# Altium PCB PCB2.PcbDoc
Units mm, origin at the board's own origin, x right, y up, seen from the top; angles counter-clockwise.
Board outline 54 x 26.8 mm, 2 copper layers (Top Layer, Bottom Layer); 33 components, 29 nets, 139 pads, 41 vias.
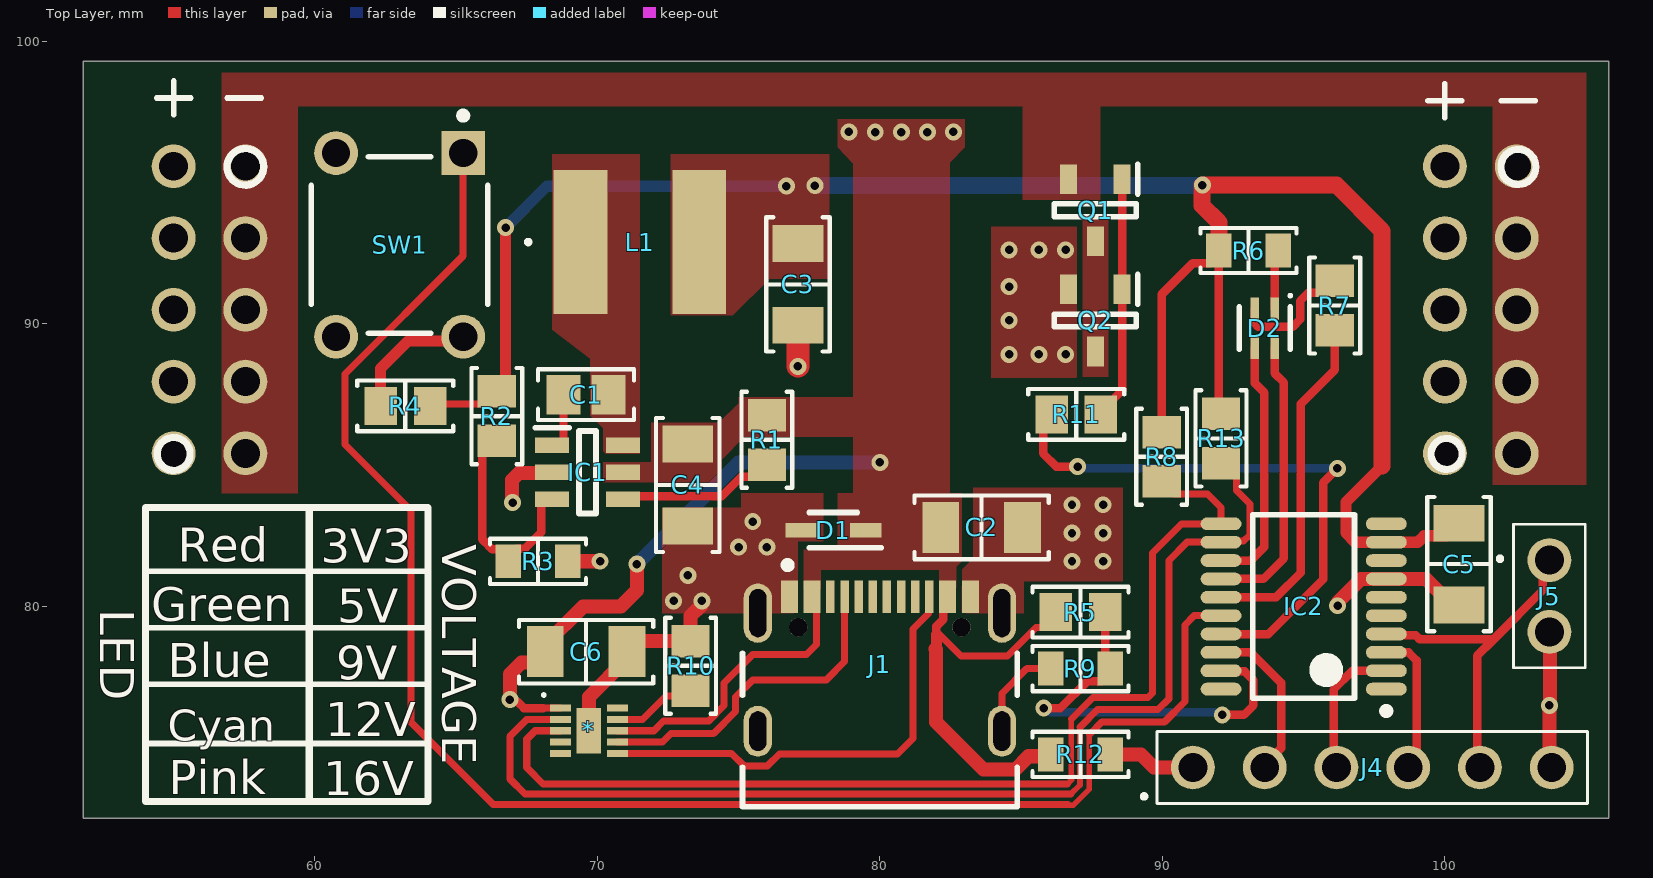
[diagram p0: Top Layer view]
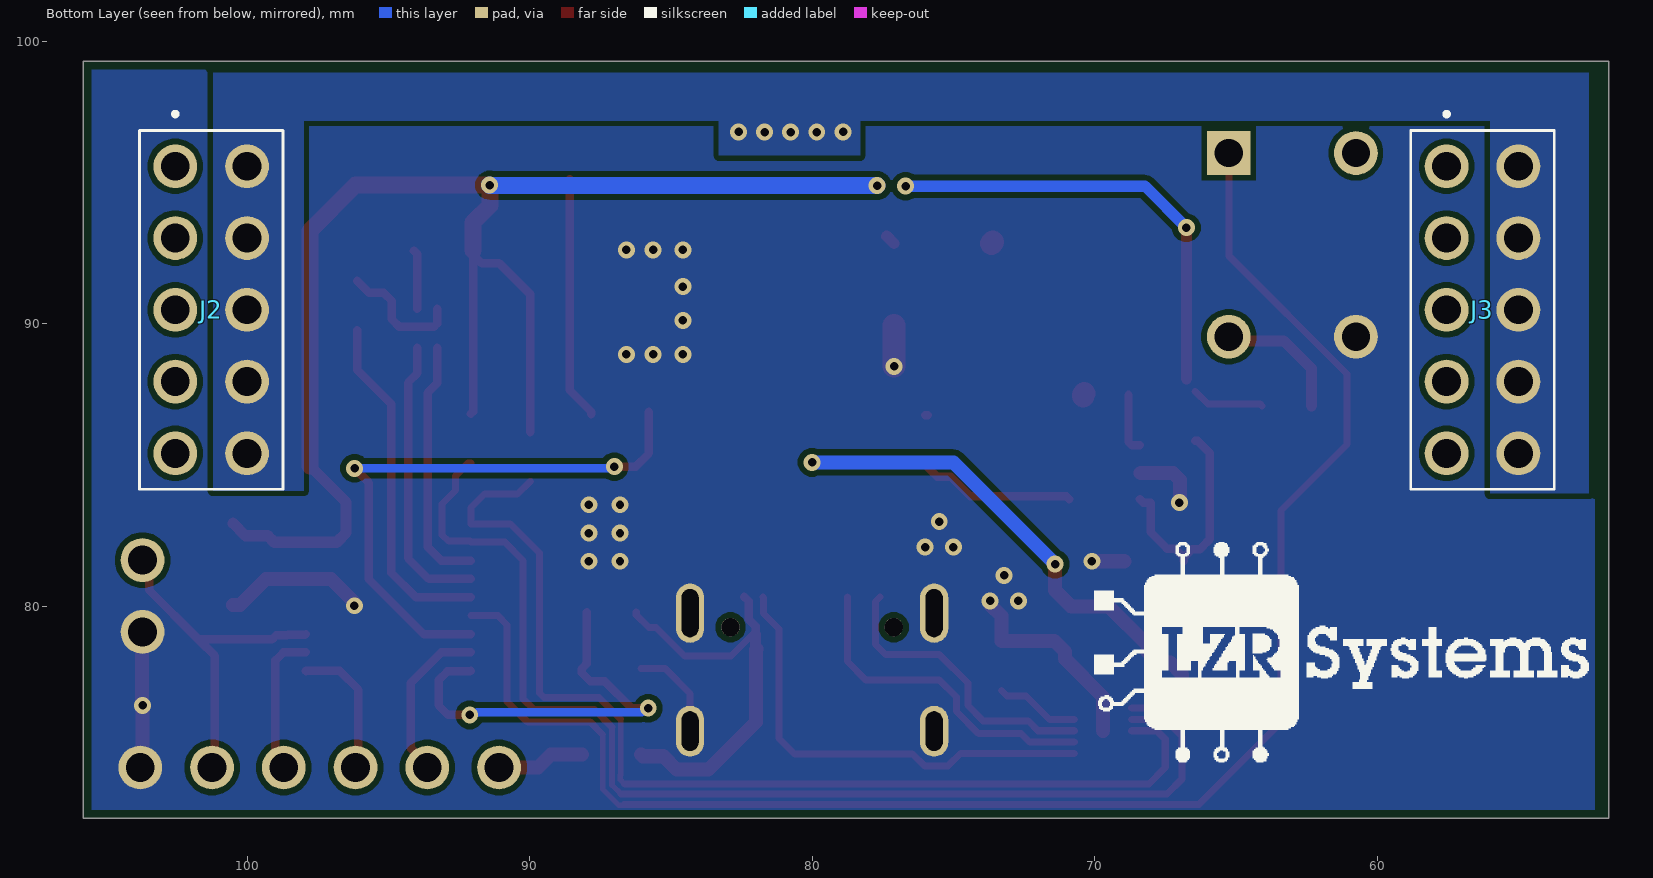
[diagram p1: Bottom Layer view, seen from below]
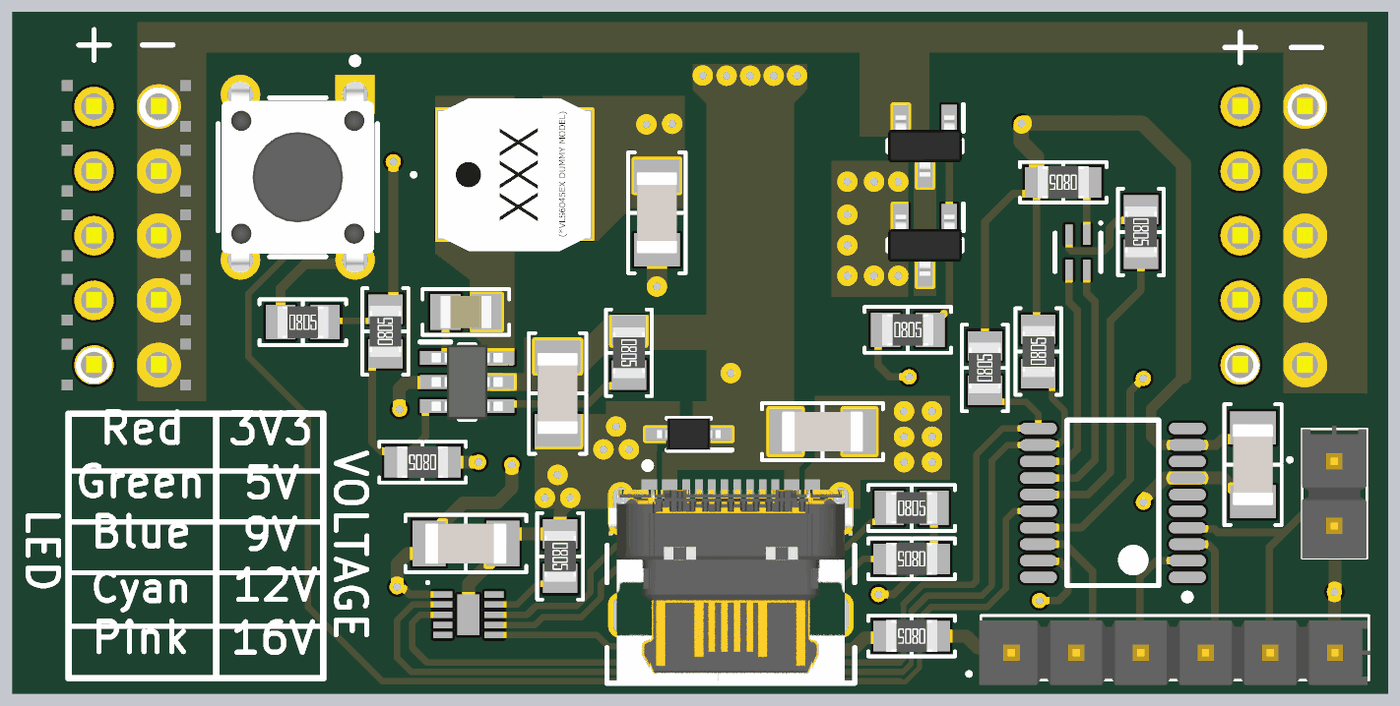
[diagram p2: 3D render of the assembled board from above, using the file's embedded part models]

## Layer stack, top to bottom
Top Solder: solder mask 0.0102, Solder Resist, Dk 3.5
Top Layer: signal copper 0.0356
Dielectric 1: dielectric 0.32, FR-4, Dk 4.8
Bottom Layer: signal copper 0.0356
Bottom Solder: solder mask 0.0102, Solder Resist, Dk 3.5

## Board outline
51.8,72.5 51.8,99.3 105.8,99.3 105.8,72.5

## Design rules (kind name [scope] priority, off if disabled: settings)
BoardOutlineClearance [All] p1: gap=0.3 ignorepadtopadclearanceinfootprint=FALSE except(0.4: Arc-SplitBarrior Arc-SplitContinuation Track-SplitBarrior Track-SplitContinuation SMDPad-SplitBarrior SMDPad-SplitContinuation THPad-SplitBarrior THPad-SplitContinuation Via-SplitBarrior Via-SplitContinuation Fill-SplitBarrior Fill-SplitContinuation Poly-SplitBarrior Poly-SplitContinuation Region-SplitBarrior Region-SplitContinuation Text-SplitBarrior Text-SplitContinuation)
Clearance "Clearance Different Nets" [All] p1: gap=0.2 ignorepadtopadclearanceinfootprint=FALSE except(0.089: Arc-Arc Arc-Track Arc-SMDPad Track-Track Track-SMDPad; 0.127: SMDPad-SMDPad SMDPad-Via THPad-Via Via-Via; 0.254: Arc-Via Arc-Text Track-Via Track-Text SMDPad-Text THPad-Text Via-Text Fill-Text Poly-Text Region-Text Text-Text; 0.5: THPad-THPad Via-Hole)
Clearance "Clearance Same Nets" [All] p2: gap=0.2 ignorepadtopadclearanceinfootprint=FALSE except(0.089: Arc-Arc Arc-Track Arc-SMDPad Track-Track Track-SMDPad SMDPad-SMDPad; 0.127: SMDPad-Via THPad-Via; 0.254: Arc-Via Arc-Text Track-Via Track-Text SMDPad-Text THPad-Text Via-Via Via-Text Fill-Text Poly-Text Region-Text Text-Text)
Clearance "Clearance Bottom Layer" [OnLayer('Bottom Layer')] p3: gap=0.203 ignorepadtopadclearanceinfootprint=TRUE except(0.254: Arc-Text Track-Text SMDPad-Text THPad-Text Via-Text Fill-Text Poly-Text Region-Text Text-Text)
Clearance "Clearance Top Layer" [OnLayer('Top Layer')] p4: gap=0.203 ignorepadtopadclearanceinfootprint=TRUE except(0.254: Arc-Text Track-Text SMDPad-Text THPad-Text Via-Text Fill-Text Poly-Text Region-Text Text-Text)
ComponentClearance [All] p1 off: gap=0.1 collisioncheckmode=3 verticalgap=0.1 showdistances=TRUE donotcheckwithout3dbody=TRUE
HoleSize [All] p1: absolutevalues=TRUE maxlimit=6.3 minlimit=0.2 maxpercent=80.000 minpercent=20.000
MinimumAnnularRing [All] p1: minimumring=0.13
MinimumSolderMaskSliver [All] p1: minsoldermaskwidth=0.1
PolygonConnect PolygonConnect_1 [All] p1: connectstyle=Direct reliefconductorwidth=0.508 reliefentries=4 polygonreliefangle="90 Angle" airgapwidth=0.254
RoutingCorners [All] p1: cornerstyle=Round minsetback=2.54 maxsetback=2.54
RoutingVias [All] p1: holewidth=0.5 width=1 viastyle="Through Hole" minholewidth=0.2 minwidth=0.35 maxholewidth=1 maxwidth=2
SilkToSilkClearance [All] p1: silktosilkclearance=0.1
SilkToSolderMaskClearance [IsPad] p1: minsilkscreentomaskgap=0.1 clearancetoexposedcopper=TRUE
SolderMaskExpansion [All] p1: expansion=0.102 istentingtop=FALSE
SupplyNets "Schematic Supply Nets_3" [InNet('+VBUS')] p1: voltage=0.000
SupplyNets "Schematic Supply Nets_2" [InNet('GND')] p2: voltage=0.000
SupplyNets "Schematic Supply Nets_1" [InNet('+2.9V')] p3: voltage=0.000
SupplyNets "Schematic Supply Nets" [InNet('+5V')] p4: voltage=0.000
Width [All] p1: maxlimit=2.54 minlimit=0.089 preferedwidth=0.381
24 further rules are at their usual default settings.

## Components (designator, comment, footprint, x,y, rotation, side; value= is the part's Value field where it differs from the comment)
* "CH224Q" SON40P200X75_HS-11N 69.7,75.6 r0 top
C1 "0.1 µF" "CAP 0805_2012" 69.6,87.5 r0 top
C2 "10 µF" "CAP 1206_3216 - 0.8MM" 83.6,82.8 r180 top
C3 "22 µF" "CAP 1206_3216 - 0.8MM" 77.1,91.4 r90 top
C4 "2.2 µF" "CAP 1206_3216 - 0.8MM" 73.2,84.3 r90 top
C5 "1µF" "CAP 1206_3216 - 1.0MM" 100.5,81.5 r90 top
C6 "1µF" "CAP 1206_3216 - 1.0MM" 69.6,78.4 r180 top
D1 "PESD24VS1UA,115" SOD2512X110N 78.35,82.7 r180 top
D2 "CLMUD-FKC-CH1NP1561BB7T4S3" SON70P150X100-4N 93.625,89.85 r270 top
IC1 "DCP3601NMR" SOT95P280X125-6N 69.65,84.75 r0 top
IC2 "CH32V006F8P6" TSOP65P640X110-20N 95,80 r180 top
J1 "USB4105-GF-A" FP-USB4105-GF-A-MFG 80,76.75 r0 top locked
J2 "TSW-105-07-F-D" TSW-105-XX-YY-D 102.54,95.58 r270 bottom
J3 "TSW-105-07-F-D" TSW-105-XX-YY-D 57.54,95.58 r270 bottom
J4 "TSW-106-14-F-S" TSW-106-XX-YY-S 91.08,74.3 r0 top
J5 "TSW-102-07-F-S" TSW-102-XX-YY-S 103.7,81.64 r270 top
L1 "VLS6045EX-150M" VLS6045 71.5,92.9 r0 top
Q1 "PMV20XNER" SOT95P230X110-3N 87.625,94.025 r270 top
Q2 "PMV20XNER" SOT95P230X110-3N 87.625,90.125 r270 top
R1 "10 k" "RES 0805_2012" 76,85.9 r270 top
R2 "64.9 kOhms" "RES 0805_2012" 66.439,86.737 r90 top
R3 "27 kOhms" "YAGEO RES 0805_2012" 67.9,81.6 r180 top
R4 "10 k" "RES 0805_2012" 63.2,87.1 r0 top
R5 "10 k" "RES 0805_2012" 87.1,79.8 r0 top
R6 "10 Ohms" "YAGEO RES 0805_2012" 93.05,92.6 r180 top
R7 "68 Ohms" "RES 0805_2012" 96.1,90.65 r270 top
R8 "4.7 kOhms" "RES 0805_2012" 89.975,85.3 r90 top
R9 "2.7 kOhms" "YAGEO RES 0805_2012" 87.1,77.8 r180 top
R10 "6.8 kOhms" "RES 0805_2012" 73.3,77.9 r270 top
R11 "100R" "RES 0805_2012" 86.95,86.8 r0 top
R12 "0 Ohms" "YAGEO RES 0805_2012" 87.1,74.763 r180 top
R13 "4.7 kOhms" "RES 0805_2012" 92.075,85.95 r90 top
SW1 "TL1105AF160Q" FP-TL1105AF160Q-MFG 63,92.8 r270 top

## Footprints (in the part's own frame and the unit in brackets; to place one, negate y for a bottom-side part, rotate by r counter-clockwise, add the part's x,y. Pads: shape width x height; smd on the part's side, far side on the other; paste and mask are expansions set on the pad)
"CAP 0805_2012" [mm] "Chip Capacitor, 2-Leads, Body 2.00x1.20mm, IPC Medium Density"
  rect 1.2x1.4 smd: 1(-0.8,0) 2(0.8,0)
  silkscreen extent -1.7,-0.9 1.7,0.9, body extent -1,-0.64 1,0.64, height 1.26
"CAP 1206_3216 - 0.8MM" [mm] "Chip Capacitor, 2-Leads, Body 3.25x1.60mm, IPC Medium Density"
  rect 1.3x1.8 smd: 1(-1.45,0) 2(1.45,0)
  silkscreen extent -2.37,-1.12 2.37,1.12, body extent -1.6,-0.8 1.6,0.8, height 0.8
"CAP 1206_3216 - 1.0MM" [mm] "Chip Capacitor, 2-Leads, Body 3.25x1.60mm, IPC Medium Density"
  rect 1.3x1.8 smd: 1(-1.45,0) 2(1.45,0)
  silkscreen extent -2.37,-1.12 2.37,1.12, body extent -1.6,-0.8 1.6,0.8, height 1
FP-TL1105AF160Q-MFG [mm]
  rect 1.55x1.55 hole 1 paste-2539.97 mask+0: 1(-3.25,2.25)
  round 1.55 hole 1 paste-2539.97 mask+0: 2(3.25,2.25) 3(-3.25,-2.25) 4(3.25,-2.25)
  silkscreen extent -4.7,-3.13 3.13,3.13, body extent -4.13,-3.22 4.13,3.22, height 0.25
FP-USB4105-GF-A-MFG [mm]
  rrect100% 1x2.1 hole 1.7 slot 0.6 at 0 deg paste-2539.97 mask+0: 1(-4.32,3.015) 2(4.32,3.015)
  rrect100% 1x1.8 hole 1.4 slot 0.6 at 0 deg paste-2539.97 mask+0: 3(-4.32,-1.165) 4(4.32,-1.165)
  rect 0.6x1.15 smd paste+0 mask+0: A1-B12(-3.2,3.59) A4-B9(-2.4,3.59) B1-A12(3.2,3.59) B4-A9(2.4,3.59)
  rect 0.3x1.15 smd paste+0 mask+0: A5(-1.25,3.59) A6(-0.25,3.59) A7(0.25,3.59) A8(1.25,3.59) B5(1.75,3.59) B6(0.75,3.59) B7(-0.75,3.59) B8(-1.75,3.59)
  round 0.65 hole 0.65 unplated paste-2539.97 mask+0: ""(-2.89,2.515) ""(2.89,2.515)
  silkscreen extent -4.86,-3.84 4.86,4.84, body extent -4.96,-3.94 4.96,4.27, height 0.25
"RES 0805_2012" [mm] "Chip Resistor, 2-Leads, Body 2.00x1.25mm, IPC Medium Density"
  rect 1.15x1.35 smd: 1(-0.875,0) 2(0.875,0)
  silkscreen extent -1.7,-0.9 1.7,0.9, body extent -1,-0.62 1,0.63, height 0.6
SOD2512X110N [mm]
  rect 1.1x0.5 smd: 1(-1.15,0) 2(1.15,0)
  silkscreen extent -1.7,-0.63 0.85,0.63, body extent -1.24,-0.63 1.24,0.62, height 0.93
SON40P200X75_HS-11N [mm] "SON, 10-Leads, Body 2.05x2.05mm, Pitch 0.40mm, Thermal Pad 1.60x0.87mm, IPC Medium Density"
  rect 0.87x1.6 smd: 0(0,0)
  rect 0.75x0.25 smd: 1(-1.01,0.8) 2(-1.01,0.4) 3(-1.01,0) 4(-1.01,-0.4) 5(-1.01,-0.8) 6(1.01,-0.8) 7(1.01,-0.4) 8(1.01,0) 9(1.01,0.4) 10(1.01,0.8)
  silkscreen extent -1.65,1.22 -1.55,1.32, body extent -1.05,-1.05 1.05,1.05, height 0.75
SON70P150X100-4N [mm] "SON, 4-Leads, Body 1.50x1.50mm, Pitch 0.70mm, IPC Medium Density"
  rect 0.8x0.3 smd: 1(-0.69,0.35) 2(-0.69,-0.35) 3(0.69,-0.35) 4(0.69,0.35)
  silkscreen extent -1.2,-0.9 0.75,0.95, body extent -0.75,-0.75 0.75,0.75, height 1
SOT95P230X110-3N [mm]
  rect 1.05x0.6 smd: 1(-1.1,0.95) 2(-1.1,-0.95) 3(1.1,0)
  silkscreen extent -1.63,-1.45 0.23,1.5, body extent -1.2,-1.45 1.2,1.45, height 0.95
SOT95P280X125-6N [mm]
  rect 1.2x0.55 smd: 1(-1.25,0.95) 2(-1.25,0) 3(-1.25,-0.95) 4(1.25,-0.95) 5(1.25,0) 6(1.25,0.95)
  silkscreen extent -1.85,-1.46 0.3,1.58, body extent -1.4,-1.46 1.4,1.46, height 1.25
TSOP65P640X110-20N [mm] "TSOP, 20-Leads, Body 6.50x4.40mm, Pitch 0.65mm, IPC Medium Density"
  oval 1.45x0.45 smd: 1(-2.925,2.925) 2(-2.925,2.275) 3(-2.925,1.625) 4(-2.925,0.975) 5(-2.925,0.325) 6(-2.925,-0.325) 7(-2.925,-0.975) 8(-2.925,-1.625) 9(-2.925,-2.275) 10(-2.925,-2.925) 11(2.925,-2.925) 12(2.925,-2.275) 13(2.925,-1.625) 14(2.925,-0.975) 15(2.925,-0.325) 16(2.925,0.325) 17(2.925,0.975) 18(2.925,1.625) 19(2.925,2.275) 20(2.925,2.925)
  silkscreen extent -3.05,-3.25 1.8,3.82, body extent -2.2,-3.25 2.2,3.25, height 1.1
TSW-102-XX-YY-S [mm]
  round 1.55 hole 1.02: 1(0,0) 2(2.54,0)
  silkscreen extent -1.27,-1.8 3.81,1.27, body extent -1.39,-1.28 3.82,1.26, height 9.16
TSW-105-XX-YY-D [mm]
  round 1.55 hole 1.02: 1(0,0) 2(0,2.54) 3(2.54,0) 4(2.54,2.54) 5(5.08,0) 6(5.08,2.54) 7(7.62,0) 8(7.62,2.54) 9(10.16,0) 10(10.16,2.54)
  silkscreen extent -1.9,-1.27 11.43,3.81, body extent -1.29,-1.27 11.41,3.81, height 11.9
TSW-106-XX-YY-S [mm]
  round 1.55 hole 1.02: 1(0,0) 2(2.54,0) 3(5.08,0) 4(7.62,0) 5(10.16,0) 6(12.7,0)
  silkscreen extent -1.78,-1.27 13.97,1.27, body extent -1.33,-1.46 14.04,1.08, height 8.12
VLS6045 [mm]
  rect 1.9x5.1 smd: 1(-2.1,0) 2(2.1,0)
  silkscreen extent -4,-0.05 -3.9,0.05, body extent -3,-3 3,3, height 4.5
"YAGEO RES 0805_2012" [mm] "Chip Resistor, 2-Leads, Body 2.00x1.25mm"
  rect 0.9x1.2 smd: 1(-1.05,0) 2(1.05,0)
  silkscreen extent -1.7,-0.8 1.7,0.8, body extent -1,-0.62 1,0.63, height 0.6

## Part data
*: library part CMP-019-00057-3, "USB-PD 3.2 Sink Controller, EPR, PPS, AVS, I2C"
C1: library part CC0805MRX7R9BB104, "CAP CER 0.1UF 50V X7R 0805", Device Package="0805 (2012 Metric)", manufacturer=Yageo, Operating Temperature="-55°C ~ 125°C", Supplier Part Number 1=311-4351-1-ND, Temperature Coefficient=X7R, Tolerance=±20%, Voltage - Rated=50V, Applications="General Purpose", Capacitance="0.1 µF", componentlink1description=Datasheet, componentlink1url=https://www.yageo.com/upload/media/product/productsearch/datasheet/mlcc/UPY-GPHC_X7R_6.3V-to-50V_18.pdf, componentlink2description="DigiKey Link", componentlink2url=https://www.digikey.com/en/products/detail/yageo/CC0805MRX7R9BB104/5884281, lastupdated="2/9/2024 8:16:09 PM", Lifecycle Status=Active, Minimum Order=1, Mounting Type="Surface Mount, MLCC", Package / Case="0805 (2012 Metric)", packaging=TapeAndReel, Part Number=CC0805MRX7R9BB104, Part Status=Active, partid=2475, price=0.01, series=CC, Size / Dimension="0.079\" L x 0.049\" W (2.00mm x 1.25mm)", Supplier 1=DigiKey, Thickness (Max)="0.037\" (0.95mm)"
C2: library part TMK316ABJ106KD-T, "CAP CER 10UF 25V X5R 1206", Device Package="1206 (3216 Metric)", manufacturer="Taiyo Yuden", Operating Temperature="-55°C ~ 85°C", Supplier Part Number 1=587-3236-1-ND, Temperature Coefficient=X5R, Tolerance=±10%, Voltage - Rated=25V, Applications="SMPS Filtering", Capacitance="10 µF", componentlink1description=Datasheet, componentlink1url=https://www.yuden.co.jp/productdata/catalog/mlcc01_e.pdf, componentlink2description="DigiKey Link", componentlink2url=https://www.digikey.com/en/products/detail/taiyo-yuden/TMK316ABJ106KD-T/3479441, lastupdated="6/4/2024 7:10:37 PM", Lifecycle Status=Active, Minimum Order=1, Mounting Type="Surface Mount, MLCC", Package / Case="1206 (3216 Metric)", packaging=TapeAndReel, Part Number=TMK316ABJ106KD-T, Part Status=Active, partid=39924, price=0.06, series=M, Size / Dimension="0.126\" L x 0.063\" W (3.20mm x 1.60mm)", Supplier 1=DigiKey, Thickness (Max)="0.037\" (0.95mm)"
C3: library part CL31A226MOCLNNC, "CAP CER 22UF 16V X5R 1206", Device Package="1206 (3216 Metric)", manufacturer="Samsung Electro-Mechanics", Operating Temperature="-55°C ~ 85°C", Supplier Part Number 1=1276-2728-1-ND, Temperature Coefficient=X5R, Tolerance=±20%, Voltage - Rated=16V, Applications="General Purpose", Capacitance="22 µF", componentlink1description=Datasheet, componentlink1url=http://www.samsungsem.com/kr/support/product-search/mlcc/CL31A226MOCLNNC.jsp, componentlink2description="DigiKey Link", componentlink2url=https://www.digikey.com/en/products/detail/samsung-electro-mechanics/CL31A226MOCLNNC/3888386, Features="Low Profile", lastupdated="6/4/2024 7:10:40 PM", Lifecycle Status=Active, Minimum Order=1, Mounting Type="Surface Mount, MLCC", Package / Case="1206 (3216 Metric)", packaging=TapeAndReel, Part Number=CL31A226MOCLNNC, Part Status=Active, partid=19106, price=0.04, series=CL, Size / Dimension="0.126\" L x 0.063\" W (3.20mm x 1.60mm)", Supplier 1=DigiKey, Thickness (Max)="0.037\" (0.95mm)"
C4: library part GCJ31CR71H225KA12K, "CAP CER 2.2UF 50V X7R 1206", Device Package="1206 (3216 Metric)", manufacturer="Murata Electronics", Operating Temperature="-55°C ~ 125°C", Ratings=AEC-Q200, Supplier Part Number 1=490-GCJ31CR71H225KA12KCT-ND, Temperature Coefficient=X7R, Tolerance=±10%, Voltage - Rated=50V, Applications="Automotive, Boardflex Sensitive", Capacitance="2.2 µF", componentlink1description=Datasheet, componentlink1url=https://search.murata.co.jp/Ceramy/image/img/A01X/G101/ENG/GCJ31CR71H225KA12-01.pdf, componentlink2description="DigiKey Link", componentlink2url=https://www.digikey.com/en/products/detail/murata-electronics/GCJ31CR71H225KA12K/11618649, Features="Soft Termination", lastupdated="6/4/2024 7:10:16 PM", Lifecycle Status=Active, Minimum Order=1, Mounting Type="Surface Mount, MLCC", Package / Case="1206 (3216 Metric)", packaging=TapeAndReel, Part Number=GCJ31CR71H225KA12K, Part Status=Active, partid=30270, price=0.06, series=GCJ, Size / Dimension="0.126\" L x 0.063\" W (3.20mm x 1.60mm)", Supplier 1=DigiKey, Thickness (Max)="0.075\" (1.90mm)"
C5 C6: library part 12065C105K4Z2A, "CAP CER 1UF 50V X7R 1206", Device Package="1206 (3216 Metric)", manufacturer="AVX Corporation", Operating Temperature="-55°C ~ 125°C", Ratings=AEC-Q200, Supplier Part Number 1=478-10886-1-ND, Temperature Coefficient=X7R, Tolerance=±10%, Voltage - Rated=50V, Applications="Automotive, Boardflex Sensitive", Capacitance=1µF, componentlink1description=Datasheet, componentlink1url=http://datasheets.avx.com/AutoMLCC.pdf, componentlink2description="DigiKey Link", componentlink2url=http://digikey.com/product-detail/en/avx-corporation/12065C105K4Z2A/478-10886-1-ND/7536455, Features="Soft Termination", lastupdated="9/2/2020 1:05:06 AM", Lifecycle Status=Active, Minimum Order=1, Mounting Type="Surface Mount, MLCC", Package / Case="1206 (3216 Metric)", packaging=TapeAndReel, Part Number=12065C105K4Z2A, Part Status=Active, partid=18944, price=0.12, series=FLEXITERM®, Size / Dimension="0.126\" L x 0.063\" W (3.20mm x 1.60mm)", Supplier 1=DigiKey, Thickness (Max)="0.037\" (0.94mm)"
D1: "Diode ESD (Uni-directional)", Manufacturer_Name=Nexperia, Mouser Part Number=771-PESD24VS1UA115, Arrow Part Number=PESD24VS1UA,115, Arrow Price/Stock=https://www.arrow.com/en/products/pesd24vs1ua115/nexperia, Datasheet Link=https://assets.nexperia.com/documents/data-sheet/PESD24VS1UA.pdf, Height=1.1mm, Manufacturer_Part_Number=PESD24VS1UA,115, Mouser Price/Stock=https://www.mouser.co.uk/ProductDetail/Nexperia/PESD24VS1UA115?qs=A1cBxND5mHKZ%252BhkKKiwSEA%3D%3D
D2: library part CMP-007-00044-3, "Cree LED RGB LED Common Annode If=10mA Vf = 1.9/2.6/2.7"
IC1: "Integrated Circuit", Manufacturer_Name=STMicroelectronics, Mouser Part Number=511-DCP3601NMR, Datasheet Link=https://www.st.com/resource/en/datasheet/dcp3601.pdf, Height=1.25mm, Manufacturer_Part_Number=DCP3601NMR, Mouser Price/Stock=https://www.mouser.co.uk/ProductDetail/STMicroelectronics/DCP3601NMR?qs=VVKQmw408U%252BduQkqjRfAvg%3D%3D
IC2: library part CMP-020-00026-3, "CH32V006 is an industrial-grade general-purpose microcontroller based on the QingKe RISC-V core.", Case/Package=TSSOP20, Clock Frequency=48MHz, Max Supply Voltage=5V, Min Supply Voltage=2.7V, I/Os=18, Interface="I2C, USART, SPI", Pins=20, RAM Size=8kB
J1: library part CMP-002-00071-1, "Conn USB 2.0 Type C RCP 24 POS 0.3mm/0.5mm Solder RA SMD 24 Terminal 1 Port T/R"
J2 J3: "Connector", Manufacturer_Name=SAMTEC, Mouser Part Number=200-TSW10507FD, Arrow Part Number=TSW-105-07-F-D, Arrow Price/Stock=https://www.arrow.com/en/products/tsw-105-07-f-d/samtec?region=europe, Datasheet Link=http://suddendocs.samtec.com/prints/tsw-xxx-xx-xxx-x-xx-xxx-mkt.pdf, Manufacturer_Part_Number=TSW-105-07-F-D, Mouser Price/Stock=https://www.mouser.co.uk/ProductDetail/Samtec/TSW-105-07-F-D?qs=rHlcMk0NooLEdgsaetqpvw%3D%3D
J4: "Connector", Manufacturer_Name=SAMTEC, Mouser Part Number=200-TSW10614FS, Arrow Part Number=TSW-106-14-F-S, Arrow Price/Stock=https://www.arrow.com/en/products/tsw-106-14-f-s/samtec, Datasheet Link=http://suddendocs.samtec.com/prints/tsw-xxx-xx-xxx-x-xx-xxx-mkt.pdf, Manufacturer_Part_Number=TSW-106-14-F-S, Mouser Price/Stock=https://www.mouser.co.uk/ProductDetail/Samtec/TSW-106-14-F-S?qs=rU5fayqh%252BE1bS3UjveTNvQ%3D%3D
J5: "Connector", Manufacturer_Name=SAMTEC, Mouser Part Number=200-TSW10207FS, Arrow Part Number=TSW-102-07-F-S, Arrow Price/Stock=https://www.arrow.com/en/products/tsw-102-07-f-s/samtec?utm_currency=USD&region=europe, Datasheet Link=http://suddendocs.samtec.com/prints/tsw-xxx-xx-xxx-x-xx-xxx-mkt.pdf, Manufacturer_Part_Number=TSW-102-07-F-S, Mouser Price/Stock=https://www.mouser.co.uk/ProductDetail/Samtec/TSW-102-07-F-S?qs=hzq9O0YpnZuC7JuvEqrjIA%3D%3D
L1: "Inductor", Manufacturer_Name=TDK, Mouser Part Number=810-VLS6045EX-150M, Arrow Part Number=VLS6045EX-150M, Arrow Price/Stock=https://www.arrow.com/en/products/vls6045ex-150m/tdk?region=nac, Datasheet Link=https://product.tdk.com/system/files/dam/doc/product/inductor/inductor/smd/catalog/inductor_commercial_power_vls6045ex_en.pdf, Manufacturer_Part_Number=VLS6045EX-150M, Mouser Price/Stock=https://www.mouser.co.uk/ProductDetail/TDK/VLS6045EX-150M?qs=oF%2FSscNnLpDh4m%2FVdQ%2FgKQ%3D%3D
Q1 Q2: "MOSFET (N-Channel)", Manufacturer_Name=Nexperia, Mouser Part Number=771-PMV20XNER, Arrow Part Number=PMV20XNER, Arrow Price/Stock=https://www.arrow.com/en/products/pmv20xner/nexperia?utm_currency=USD&region=nac, Datasheet Link=https://assets.nexperia.com/documents/data-sheet/PMV20XNE.pdf, Height=1.1mm, Manufacturer_Part_Number=PMV20XNER, Mouser Price/Stock=https://www.mouser.co.uk/ProductDetail/Nexperia/PMV20XNER?qs=%252BRKXB2WKlSevPnXiP0DAaQ%3D%3D
R1 R4 R5: library part RNCS0805BKE10K0, "RES 10K OHM 0.1% 1/10W 0805", Device Package="0805 (2012 Metric)", manufacturer="Stackpole Electronics Inc", Operating Temperature="-55°C ~ 155°C", Power (Watts)="0.1W, 1/10W", Ratings=AEC-Q200, Resistance="10 kOhms", Supplier Device Package=0805, Supplier Part Number 1=RNCS0805BKE10K0CT-ND, Temperature Coefficient=±25ppm/°C, Tolerance=±0.1%, componentlink1description=Datasheet, componentlink1url=https://www.seielect.com/catalog/sei-rncs_rnch.pdf, componentlink2description="DigiKey Link", componentlink2url=https://www.digikey.com/en/products/detail/stackpole-electronics-inc/RNCS0805BKE10K0/1800067, Composition="Thin Film", Features="Anti-Corrosive, Automotive AEC-Q200, Moisture Resistant", Height - Seated (Max)="0.026\" (0.65mm)", lastupdated="2/8/2024 9:02:39 PM", Lifecycle Status=Active, Minimum Order=1, Number of Terminations=2, Package / Case="0805 (2012 Metric)", packaging=TapeAndReel, Part Number=RNCS0805BKE10K0, Part Status=Active, partid=27713, price=0.07, series=RNCS, Size / Dimension="0.079\" L x 0.049\" W (2.00mm x 1.25mm)", Supplier 1=DigiKey
R2: library part RMCF0805FT64K9, "RES 64.9K OHM 1% 1/8W 0805", Device Package="0805 (2012 Metric)", manufacturer="Stackpole Electronics Inc", Operating Temperature="-55°C ~ 155°C", Power (Watts)="0.125W, 1/8W", Ratings=AEC-Q200, Supplier Device Package=0805, Supplier Part Number 1=738-RMCF0805FT64K9CT-ND, Temperature Coefficient=±100ppm/°C, Tolerance=±1%, componentlink1description=Datasheet, componentlink1url=https://www.seielect.com/catalog/sei-packaging.pdf, componentlink2description="DigiKey Link", componentlink2url=https://www.digikey.com/en/products/detail/stackpole-electronics-inc/RMCF0805FT64K9/1713303, Composition="Thick Film", Features="Automotive AEC-Q200", Height - Seated (Max)="0.026\" (0.65mm)", lastupdated="2/8/2024 9:01:11 PM", Lifecycle Status=Active, Minimum Order=1, Number of Terminations=2, Package / Case="0805 (2012 Metric)", packaging=CutTape, Part Number=RMCF0805FT64K9, Part Status=Active, partid=47058, price=0.01, Resistance="64.9 kOhms", series=RMCF, Size / Dimension="0.079\" L x 0.049\" W (2.00mm x 1.25mm)", Supplier 1=DigiKey
R3: library part AC0805JR-0727KL, "RES SMD 27K OHM 5% 1/8W 0805", Device Package="0805 (2012 Metric)", manufacturer=Yageo, Operating Temperature="-55°C ~ 155°C", Power (Watts)="0.125W, 1/8W", Ratings=AEC-Q200, Supplier Device Package=0805, Supplier Part Number 1=13-AC0805JR-0727KLCT-ND, Temperature Coefficient=±100ppm/°C, Tolerance=±5%, componentlink1description=Datasheet, componentlink1url=https://www.yageo.com/upload/media/product/productsearch/datasheet/rchip/PYu-AC_51_RoHS_L_10.pdf, componentlink2description="DigiKey Link", componentlink2url=https://www.digikey.com/en/products/detail/yageo/AC0805JR-0727KL/5897103, Composition="Thick Film", Features="Automotive AEC-Q200, Moisture Resistant", Height - Seated (Max)="0.024\" (0.60mm)", lastupdated="7/25/2024 9:20:06 AM", Lifecycle Status=Active, Minimum Order=1, Number of Terminations=2, Package / Case="0805 (2012 Metric)", packaging=TapeAndReel, Part Number=AC0805JR-0727KL, partid=84032, price=0.01, Resistance="27 kOhms", series=AC, Size / Dimension="0.079\" L x 0.049\" W (2.00mm x 1.25mm)", Supplier 1=DigiKey
R6: library part RC0805JR-0710RL, "RES 10 OHM 5% 1/8W 0805", Device Package="0805 (2012 Metric)", manufacturer=Yageo, Operating Temperature="-55°C ~ 155°C", Power (Watts)="0.125W, 1/8W", Supplier Device Package=0805, Supplier Part Number 1=311-10ARCT-ND, Temperature Coefficient=±200ppm/°C, Tolerance=±5%, componentlink1description=Datasheet, componentlink1url=https://www.yageo.com/upload/media/product/productsearch/datasheet/rchip/PYu-RC_Group_51_RoHS_L_10.pdf, componentlink2description="DigiKey Link", componentlink2url=https://www.digikey.com/en/products/detail/yageo/RC0805JR-0710RL/728240, Composition="Thick Film", Features="Moisture Resistant", Height - Seated (Max)="0.024\" (0.60mm)", lastupdated="7/25/2024 9:20:21 AM", Lifecycle Status=Active, Minimum Order=1, Number of Terminations=2, Package / Case="0805 (2012 Metric)", packaging=TapeAndReel, Part Number=RC0805JR-0710RL, Part Status=Active, partid=39854, price=0.01, Resistance="10 Ohms", series=RC_L, Size / Dimension="0.079\" L x 0.049\" W (2.00mm x 1.25mm)", Supplier 1=DigiKey
R7: library part CRGP0805F68R, "RES 68 OHM 1% 1/3W 0805", Device Package="0805 (2012 Metric)", manufacturer="TE Connectivity Passive Product", Operating Temperature="-55°C ~ 155°C", Power (Watts)="0.333W, 1/3W", Supplier Device Package=0805, Supplier Part Number 1=A130463CT-ND, Temperature Coefficient=±100ppm/°C, Tolerance=±1%, componentlink1description=Datasheet, componentlink1url=https://www.te.com/commerce/DocumentDelivery/DDEController?Action=srchrtrv&DocNm=9-1773463-9&DocType=DS&DocLang=English, componentlink2description="DigiKey Link", componentlink2url=https://www.digikey.com/en/products/detail/te-connectivity-passive-product/CRGP0805F68R/8577065, Composition="Thick Film", Features="Pulse Withstanding", Height - Seated (Max)="0.026\" (0.65mm)", lastupdated="2/8/2024 9:02:34 PM", Lifecycle Status=Active, Minimum Order=1, Number of Terminations=2, Package / Case="0805 (2012 Metric)", packaging=TapeAndReel, Part Number=CRGP0805F68R, Part Status=Active, partid=28711, price=0.02, Resistance="68 Ohms", series=CRGP, Size / Dimension="0.079\" L x 0.049\" W (2.00mm x 1.25mm)", Supplier 1=DigiKey
R8 R13: library part TNPU08054K70AYEA00, "RES 4.7 KOHM 0.05% 1/8W 0805", Device Package="0805 (2012 Metric)", manufacturer="Vishay Dale", Operating Temperature="-55°C ~ 125°C", Power (Watts)="0.125W, 1/8W", Ratings=AEC-Q200, Supplier Device Package=0805, Supplier Part Number 1=541-4670-1-ND, Temperature Coefficient=±10ppm/°C, Tolerance=±0.05%, componentlink1description=Datasheet, componentlink1url=http://www.vishay.com/docs/28779/tnpue3.pdf, componentlink2description="DigiKey Link", componentlink2url=https://www.digikey.com/en/products/detail/vishay-dale/TNPU08054K70AYEA00/9448863, Composition="Thin Film", Features="Anti-Sulfur, Automotive AEC-Q200, Moisture Resistant", Height - Seated (Max)="0.022\" (0.55mm)", lastupdated="2/8/2024 9:02:30 PM", Lifecycle Status=Active, Minimum Order=1, Number of Terminations=2, Package / Case="0805 (2012 Metric)", packaging=TapeAndReel, Part Number=TNPU08054K70AYEA00, Part Status=Active, partid=29741, price=0.63, Resistance="4.7 kOhms", series="TNPU e3", Size / Dimension="0.079\" L x 0.049\" W (2.00mm x 1.25mm)", Supplier 1=DigiKey
R9: library part RC0805FR-132K7L, "RES 2.7K OHM 1% 1/8W 0805", Device Package="0805 (2012 Metric)", manufacturer=Yageo, Operating Temperature="-55°C ~ 155°C", Power (Watts)="0.125W, 1/8W", Supplier Device Package=0805, Supplier Part Number 1=13-RC0805FR-132K7LCT-ND, Temperature Coefficient=±100ppm/°C, Tolerance=±1%, componentlink1description=Datasheet, componentlink1url=https://www.yageo.com/upload/media/product/productsearch/datasheet/rchip/PYu-RC_Group_51_RoHS_L_11.pdf, componentlink2description="DigiKey Link", componentlink2url=https://www.digikey.com/en/products/detail/yageo/RC0805FR-132K7L/14286471, Composition="Thick Film", Height - Seated (Max)="0.024\" (0.60mm)", lastupdated="7/25/2024 9:20:10 AM", Lifecycle Status=Active, Minimum Order=1, Number of Terminations=2, Package / Case="0805 (2012 Metric)", packaging=CutTape, Part Number=RC0805FR-132K7L, Part Status=Active, partid=66308, price=0.01, Resistance="2.7 kOhms", series=RC_L, Size / Dimension="0.079\" L x 0.049\" W (2.00mm x 1.25mm)", Supplier 1=DigiKey
R10: library part ERJ-6ENF6801V, "RES SMD 6.8K OHM 1% 1/8W 0805", Device Package="0805 (2012 Metric)", manufacturer="Panasonic Electronic Components", Operating Temperature="-55°C ~ 155°C", Power (Watts)="0.125W, 1/8W", Ratings=AEC-Q200, Supplier Device Package=0805, Supplier Part Number 1=P6.80KCCT-ND, Temperature Coefficient=±100ppm/°C, Tolerance=±1%, componentlink1description=Datasheet, componentlink1url=https://industrial.panasonic.com/cdbs/www-data/pdf/RDA0000/AOA0000C304.pdf, componentlink2description="DigiKey Link", componentlink2url=https://www.digikey.com/en/products/detail/panasonic-electronic-components/ERJ-6ENF6801V/1746527, Composition="Thick Film", Features="Automotive AEC-Q200", Height - Seated (Max)="0.028\" (0.70mm)", lastupdated="2/8/2024 9:02:28 PM", Lifecycle Status=Active, Minimum Order=1, Number of Terminations=2, Package / Case="0805 (2012 Metric)", packaging=TapeAndReel, Part Number=ERJ-6ENF6801V, Part Status=Active, partid=30159, price=0.01, Resistance="6.8 kOhms", series=ERJ-6EN, Size / Dimension="0.079\" L x 0.049\" W (2.00mm x 1.25mm)", Supplier 1=DigiKey
R11: library part CRCW0805180RFKEAHP, "RES SMD 180 OHM 1% 1/2W 0805", Device Package="0805 (2012 Metric)", manufacturer="Vishay Dale", Operating Temperature="-55°C ~ 155°C", Power (Watts)="0.5W, 1/2W", Ratings=AEC-Q200, Resistance="180 Ohms", Supplier Device Package=0805, Supplier Part Number 1=541-180TCT-ND, Temperature Coefficient=±100ppm/°C, Tolerance=±1%, componentlink1description=Datasheet, componentlink1url=http://www.vishay.com/docs/20043/crcwhpe3.pdf, componentlink2description="DigiKey Link", componentlink2url=https://www.digikey.com/en/products/detail/vishay-dale/CRCW0805180RFKEAHP/2226882, Composition="Thick Film", Features="Automotive AEC-Q200, Pulse Withstanding", Height - Seated (Max)="0.020\" (0.50mm)", lastupdated="2/8/2024 9:02:28 PM", Lifecycle Status=Active, Minimum Order=1, Number of Terminations=2, Package / Case="0805 (2012 Metric)", packaging=TapeAndReel, Part Number=CRCW0805180RFKEAHP, Part Status=Active, partid=30363, price=0.02, series=CRCW-HP, Size / Dimension="0.079\" L x 0.049\" W (2.00mm x 1.25mm)", Supplier 1=DigiKey
R12: library part RC0805FR-070RL, "RES 0 OHM JUMPER 1/8W 0805", Device Package="0805 (2012 Metric)", manufacturer=Yageo, Operating Temperature="-55°C ~ 155°C", Power (Watts)="0.125W, 1/8W", Supplier Device Package=0805, Supplier Part Number 1=311-0.0CRCT-ND, Tolerance=Jumper, componentlink1description=Datasheet, componentlink1url=https://www.yageo.com/upload/media/product/productsearch/datasheet/rchip/PYu-RC_Group_51_RoHS_L_10.pdf, componentlink2description="DigiKey Link", componentlink2url=https://www.digikey.com/en/products/detail/yageo/RC0805FR-070RL/2827620, Composition="Thick Film", Features="Moisture Resistant", Height - Seated (Max)="0.024\" (0.60mm)", lastupdated="7/25/2024 9:20:16 AM", Lifecycle Status=Active, Minimum Order=1, Number of Terminations=2, Package / Case="0805 (2012 Metric)", packaging=CutTape, Part Number=RC0805FR-070RL, Part Status=Active, partid=47635, price=0.01, Resistance="0 Ohms", series=RC_L, Size / Dimension="0.079\" L x 0.049\" W (2.00mm x 1.25mm)", Supplier 1=DigiKey
SW1: library part CMP-011-00014-1, "Switch Tactile N.O. SPST Round Button PC Pins 0.05A 50VDC 1.57N Thru-Hole", Current Rating=50mA, Max Operating Temperature=70°C, Min Operating Temperature=-20°C, Max Current Rating=50mA, Mounting Technology="Through Hole", Throw Configuration=SPST

## Via types
v1: diameter 0.6, hole 0.3, Top Layer to Bottom Layer, 41 vias

## Nets (pads, with @x,y where several pads share a name; then routed paths per layer and width w, separated by ;. In a path a pad name is that pad's centre, name@x,y a point inside that pad or via, vN(x,y) a via of type N, cw(c..) or ccw(c..) an arc to the next point about the centre after c; other vN are vias at no path point)
+2.9V: C3.2 C5.2 IC2.9 L1.2 R2.2 R4.2 R6.2 R8.2 R13.2 | length 71.3
  Top Layer w0.25: R4.2 64.137,87.162 65.989,87.162 R2.2
  Top Layer w0.3: R8.2 89.975,91.05 91.075,92.15 91.7,92.15 92,92.45 R6.2 92,86.9 R13.2
  Top Layer w0.4: R2.2@66.75,88.05 v1(66.75,93.407) ; C3.2 C3.2@77.354,93.104 ; 97.775,84.968 96.5,83.693 96.5,82.6 96.825,82.275 IC2.9 99.036,82.275 99.261,82.5 100.05,82.5 C5.2
  Top Layer w0.6: v1@91.401,94.9 91.401,94.199 92,93.6 R6.2 ; v1(91.418,94.916) 96.159,94.916 97.775,93.3 97.775,84.968
  Top Layer w0.8: L1.2 L1.2@73.65,92.85
  Bottom Layer w0.4: v1(66.75,93.407) 68.22,94.878 v1(76.688,94.878)
  Bottom Layer w0.6: v1(77.7,94.9) 91.402,94.9 v1(91.418,94.916)
+5V: J4.1 R12.1 | length 3
  Top Layer w0.5: R12.1 89.237,74.763 89.7,74.3 J4.1@90.98,74.3
+VBUS: *.1 *.8 C2.2 C4.2 C6.2 D1.1 IC1.5 J1.A4-B9 J1.B4-A9 J2.2 J2.4 J2.6 J2.8 J2.10 J3.2 J3.4 J3.6 J3.8 J3.10 R1.1 R5.1 R12.2 | length 44.9
  Top Layer w0.25: 68.076,76.4 *.1 ; *.8 72,75.6 72.343,75.943 73.941,75.943 74.487,76.489 74.487,77.287 75.5,78.3 77.4,78.3 77.76,78.66 77.76,80.18 J1.A4-B9 ; 82,79.064 82.054,79.064 82.875,78.243 84.515,78.243 85.522,79.25 85.775,79.25 86.225,79.7 R5.1
  Top Layer w0.3: v1(66.9,76.7) 66.957,76.643 67.155,76.643 67.397,76.4 68.076,76.4 ; R1.1@75.9,86.775 R1.1 ; 82,79.064 82,79.299 82.241,79.54 82.241,79.801 82.25,79.81 82.25,80.19 J1.B4-A9
  Top Layer w0.4: 81.97,78.492 82,78.521 82,79
  Top Layer w0.5: v1(66.9,76.7) 66.9,77.6 67.311,78.011 67.761,78.011 C6.2 ; C6.2@68.15,78.65 69.5,80 70.825,80 71.4,80.575 v1(71.4,81.5) ; 81.97,78.492 81.99,78.472 81.99,75.91 83.665,74.235 84.799,74.235 85.261,74.697 85.984,74.697 R12.2
  Bottom Layer w0.5: v1(71.4,81.5) 75,85.1 v1(80,85.1)
  other v1: 78.9,96.8 79.835,96.791 80.763,96.791 81.684,96.791 82.6,96.8
ADC_IN3: IC2.19 R5.2 R9.1 | length 14.9
  Top Layer w0.3: v1(85.8,76.4) 86.391,76.4 87.341,77.35 87.85,77.35 88.15,77.65 R9.1 87.975,77.975 R5.2 ; IC2.19 92.098,77.702 92.912,77.702 93.223,77.391 93.223,76.497 92.887,76.161 v1(92.119,76.161)
  Bottom Layer w0.3: v1(85.8,76.4) 85.881,76.4 86.03,76.251 91.855,76.251 91.888,76.218 92.062,76.218 v1(92.119,76.161)
B_LED: D2.4 IC2.14 | length 10.1
  Top Layer w0.3: IC2.14 93.575,80.975 94.3,81.7 94.3,87.925 93.975,88.25 D2.4
CC1: *.7 J1.A5 | length 11.8
  Top Layer w0.25: *.7 72.3,75.2 72.6,75.5 74.117,75.5 74.893,76.276 74.893,76.795 75.498,77.4 78.1,77.4 78.75,78.05 J1.A5
CC2: *.6 J1.B5 | length 16.3
  Top Layer w0.25: *.6 74.748,74.8 75.188,74.36 76.022,74.36 76.443,74.781 80.622,74.781 81.174,75.333 81.174,79.201 81.725,79.752 81.725,80.315 J1.B5@81.744,80.334
G_LED: D2.3 IC2.13 | length 8.9
  Top Layer w0.3: IC2.13 93.125,81.625 93.605,82.105 93.605,87.57 93.275,87.9 D2.3
GND: *.0 C2.1 C3.1 C4.1 C5.1 C6.1 D1.2 IC1.2 IC2.7 J1.1 J1.2 J1.3 J1.4 J1.A1-B12 J1.B1-A12 J4.6 J5.2 Q2.2 R3.1 R9.2 R10.1 SW1.4 | length 25.6
  Top Layer w0.25: J1.4 84.32,76.92 85.2,77.8 R9.2
  Top Layer w0.5: v1(67.002,83.677) 66.983,83.696 66.983,83.767 66.981,83.769 66.981,84.481 67.229,84.729 IC1.2@68.379,84.729 ; R3.1 v1(70.1,81.6) ; *.0 69.7,76.8 71.05,78.15 C6.1 71.425,78.775 R10.1 73.3,79.663 73.681,80.044 73.681,80.181 v1(73.7,80.2) ; v1(96.2,80.025) 96.219,80.044 96.219,80.161 97.034,80.975 99.325,80.975 100.25,80.05 C5.1 ; J4.6@103.68,74.3 103.7,74.32 v1(103.7,76.5) 103.719,76.519 103.719,78.949 J5.2@103.75,78.98
  Top Layer w0.8: v1(77.1,88.5) C3.1
  other v1: 72.7,80.2 73.2,81.1 86.8,81.6 87.9,81.6 75,82.1 76,82.1 86.8,82.6 87.9,82.6 75.5,83 86.8,83.6 87.9,83.6 84.575,88.925 85.625,88.925 86.575,88.925 84.575,90.125 84.575,91.325 84.575,92.625 85.625,92.625 86.575,92.625
I2C_SCL: *.2 IC2.12 R13.1 | length 40.8
  Top Layer w0.2: 86.757,73.357 87.082,73.682 87.082,75.719 87.092,75.729
  Top Layer w0.25: *.2 67.5,76 66.9,75.4 66.9,73.9 67.443,73.357 86.757,73.357 ; 87.092,75.729 87.092,75.739 87.701,76.347 89.847,76.347 90.233,76.733 90.233,81.633 90.875,82.275 IC2.12 92.112,82.312 92.873,82.312 93.094,82.534 93.094,83.631 92.624,84.101 92.624,84.625 92.174,85.075 R13.1
I2C_SDA: *.3 IC2.11 R8.1 | length 38.2
  Top Layer w0.2: 86.641,73.721 86.786,73.866 86.786,74.02 86.778,74.028 86.778,76.016
  Top Layer w0.25: *.3 67.8,75.6 67.5,75.3 67.5,74.3 68.079,73.721 86.641,73.721 ; 86.778,76.016 87.54,76.778 89.485,76.778 89.65,76.943 89.65,81.898 90.677,82.925 IC2.11 92.075,83.5 91.6,83.975 90.425,83.975 R8.1
Net*_9: *.9 R10.2 | length 3
  Top Layer w0.25: *.9 71.6,76 72.425,76.825 73.1,76.825 R10.2
NetC1_1: C1.1 IC1.1 | length 2.1
  Top Layer w0.3: IC1.1 68.675,85.7 68.8,85.825 C1.1
NetC1_2: C1.2 IC1.6 L1.1 | length 0.1
  Top Layer w0.8: C1.2@70.361,87.539 C1.2 C1.2@70.4,87.45
NetD2_1: D2.1 R6.1 | length 2.1
  Top Layer w0.3: D2.1 93.975,92.475 R6.1
NetD2_2: D2.2 R7.1 | length 4.5
  Top Layer w0.3: D2.2 93.275,90.015 93.389,89.901 94.613,89.901 94.873,90.161 94.873,90.812 95.161,91.1 95.675,91.1 R7.1
NetIC1_3: IC1.3 R2.1 R3.2 | length 8.1
  Top Layer w0.3: 66.161,82.139 66.275,82.025 66.55,82.025 66.85,81.725 R3.2 ; 66.161,82.139 65.922,82.378 65.922,85.437 66.347,85.862 R2.1 ; R3.2@66.85,81.75 67.15,82.05 67.44,82.05 68.021,82.63 68.021,83.675 IC1.3@68.022,83.677 ; IC1.3@68.027,83.677 68.277,83.677 IC1.3
NetIC1_4: IC1.4 R1.2 | length 5.6
  Top Layer w0.3: IC1.4 70.995,83.895 74.395,83.895 75.1,84.6 75.575,84.6 R1.2
NetQ1_1: Q1.1 Q2.1 R11.2 | length 8.6
  Top Layer w0.3: R11.2 87.825,86.9 88.575,87.65 Q2.1 Q1.1
NetQ1_3: Q1.3 Q2.3
NetR4_1: R4.1 SW1.2 | length 4.7
  Top Layer w0.4: R4.1 62.325,88.425 63.3,89.4 65.1,89.4 SW1.2
PIN_GND: J2.1 J2.3 J2.5 J2.7 J2.9 J3.1 J3.3 J3.5 J3.7 J3.9 Q1.2
PWR_EN: IC2.17 R11.1 | length 20.7
  Top Layer w0.3: R11.1@85.775,86.9 85.775,85.416 86.241,84.95 v1(87,84.95) ; IC2.17 93.75,79.025 95.686,80.961 95.686,84.38 v1(96.197,84.891)
  Bottom Layer w0.3: v1(87,84.95) 87.054,84.896 v1@96.191,84.896
PWR_SEL: IC2.16 SW1.1 | length 58.2
  Top Layer w0.2: 86.651,72.986 86.676,72.961 86.84,72.961 87.414,73.535 87.414,75.471
  Top Layer w0.25: SW1.1 65.25,92.414 61.062,88.227 61.062,85.738 63.4,83.4 63.4,75.9 66.314,72.986 86.651,72.986 ; 87.414,75.471 87.861,75.917 90.081,75.917 90.8,76.637 90.8,79.347 91.127,79.675 IC2.16
R_LED: IC2.15 R7.2 | length 12.3
  Top Layer w0.3: IC2.15 94.025,80.325 94.9,81.2 94.9,87.175 96.1,88.375 R7.2
RST: IC2.4 J4.5 J5.1 | length 12.2
  Top Layer w0.3: IC2.4 97.954,78.996 98.56,78.996 98.578,78.978 98.97,78.978 99.108,78.841 101.727,78.841 ; J4.5@101.14,74.3 101.14,78.254 101.727,78.841 ; J5.1@103.75,81.52 103.471,81.241 103.471,80.585 101.727,78.841
SWIO: IC2.18 J4.2 | length 5.9
  Top Layer w0.3: IC2.18 93.125,78.375 94.2,77.3 94.2,74.98 J4.2@93.52,74.3
UART_RX: IC2.3 J4.4 | length 4.7
  Top Layer w0.3: IC2.3 98.714,78.375 99,78.089 J4.4@99,74.6
UART_TX: IC2.2 J4.3 | length 4.9
  Top Layer w0.3: J4.3@96.06,74.3 96.06,77.06 96.725,77.725 97.875,77.725 97.9,77.7 IC2.2
pads on no net: *.4 *.5 *.10 IC2.1 IC2.5 IC2.6 IC2.8 IC2.10 IC2.20 J1. J1.A6 J1.A7 J1.A8 J1.B6 J1.B7 J1.B8 SW1.3

## Polygon pours and split planes (outlines as drawn)
NetQ1_3 on Top Layer "NETQ1_3_L01_P008" (solid, pour order 8): 88.075,88.125 87.175,88.125 87.175,93.725 88.075,93.725
GND on Top Layer "GND_L01_P013" (solid, pour order 13): 87,93.45 83.95,93.45 83.95,88.1 87,88.1
PIN_GND on Top Layer "PIN_GND_L01_P021" (solid, pour order 21): 85.05,97.875 85.05,94.4 87.8,94.4 87.8,97.875
+VBUS on Top Layer "+VBUS_L01_P018" (solid, pour order 18): 78.5,97.25 83,97.25 83,96.25 82.475,95.699 82.475,83.75 79.05,83.75 79.05,95.672 78.5,96.25
GND on Top Layer "GND_L01_P007" (solid, pour order 7): 82.897,79.762 82.909,81.309 83.3,81.7 83.3,84.2 88.6,84.2 88.6,80.9 85.1,80.9 85.1,79.762
PIN_GND on Top Layer "PIN_GND_L01_P020" (solid, pour order 20): 56.7,84 56.7,98.9 105,98.9 105,84.2 104.9,84.3 101.7,84.3 101.7,97.7 59.4,97.7 59.4,84
+VBUS on Top Layer "+VBUS_L01_P012" (solid, pour order 12): 71.9,86.5 74.3,86.5 75,87.2 75,87.4 79.6,87.4 79.6,86 75.2,86 74.4,85.2 74.4,84.5 74.3,84.4 71.9,84.4
GND on Top Layer "GND_L01_P006" (solid, pour order 6): 77.103,79.767 77.1,79.77 77.1,82.3 78,82.3 78,84 75.1,84 75.1,83.5 72.3,83.5 72.3,79.767
+2.9V on Top Layer "+2.9V_L01_P001" (solid, pour order 1): 72.6,90.3 74.8,90.3 76.1,91.6 78.2,91.6 78.2,96 72.6,96
+VBUS on Top Layer "+VBUS_L01_P003" (solid, pour order 3): 77.3,82 78.5,82 78.5,84 82.9,84 82.9,81.6 82.7,81.4 82.7,79.757 82.1,79.757 82.1,81.3 77.9,81.3 77.9,79.757 77.3,79.757
+VBUS on Top Layer "+VBUS_L01_P002" (solid, pour order 2): 70.2,85.1 71.9,85.1 71.9,86.5 74.2,86.5 74.3,86.4 74.3,84.4 70.2,84.4
NetC1_2 on Top Layer "NETC1_2_L01_P000" (solid, pour order 0): 71.5,85.4 70.3,85.4 70.2,85.5 70.2,86.3 69.747,86.753 69.747,88.775 68.4,89.8 68.4,96 71.5,96 71.5,88.5
GND on Bottom Layer "GND_L02_P015" (solid, remove dead copper, pour order 15): 52.3,99.3 105.8,99.3 105.8,72.561 52.3,72.561
+VBUS on Bottom Layer "+VBUS_L02_P009" (solid, pour order 9): 56,97.2 56,84 52.5,84 52.5,98.9 101.2,98.9 101.2,84.1 98,84.1 98,97.2
+VBUS on Bottom Layer "+VBUS_L02_P014" (solid, remove dead copper, pour order 14): 83.3,97.9 83.3,95.969 78.3,95.969 78.3,97.9

## Silkscreen, mask and mechanical layers (free items; w line width, h text height)
Top Overlay:
  circle w0.254: c55,85.4 r0.583
  circle w0.254: c57.54,95.56 r0.649
  circle w0.254: c100.06,85.4 r0.549
  circle w0.254: c102.6,95.56 r0.621
  lines w0.2: 54,75.15 64,75.15 ; 54,77.25 64,77.25 ; 54,79.25 64,79.25 ; 54.1,81.25 64,81.25 ; 54.4,98 55.6,98 55,98 55,97.4 55,98.6 ; 56.9,98 57.5,98 58.1,98 ; 99.4,97.9 100.6,97.9 100,97.9 100,97.3 100,98.5 ; 102,97.9 102.6,97.9 103.2,97.9
  lines w0.254: 59.8,73.1 54,73.1 54,83.5 59.8,83.5 ; 59.8,73.1 59.8,83.5 ; 59.8,73.1 64,73.1 64,83.5 59.8,83.5 ; 59.8,73.1 59.8,83.5
  text "VOLTAGE" at 64.5,82.2 h1.2 r270
  text "Red" at 55.15,81.575 h1.2
  text "3V3" at 60.2,81.55 h1.2
  text "LED" at 52.4,79.9 h1.2 r270
  text "Green" at 54.2,79.475 h1.2
  text "5V" at 60.8,79.425 h1.2
  text "Blue" at 54.8,77.5 h1.2
  text "9V" at 60.75,77.4 h1.2
  text "12V" at 60.375,75.4 h1.2
  text "Cyan" at 54.8,75.25 h1.1
  text "Pink" at 54.825,73.35 h1.2
  text "16V" at 60.3,73.325 h1.2
Bottom Overlay:
  drawing of 9 lines, arcs and shapes, not listed